# Altium PCB PCB1.PcbDoc
Units mil, origin at the board's own origin, x right, y up, seen from the top; angles counter-clockwise.
Board outline 1415.03 x 1550.03 mil, 2 copper layers (Top Layer, Bottom Layer); 27 components, 62 nets, 128 pads, 78 vias.
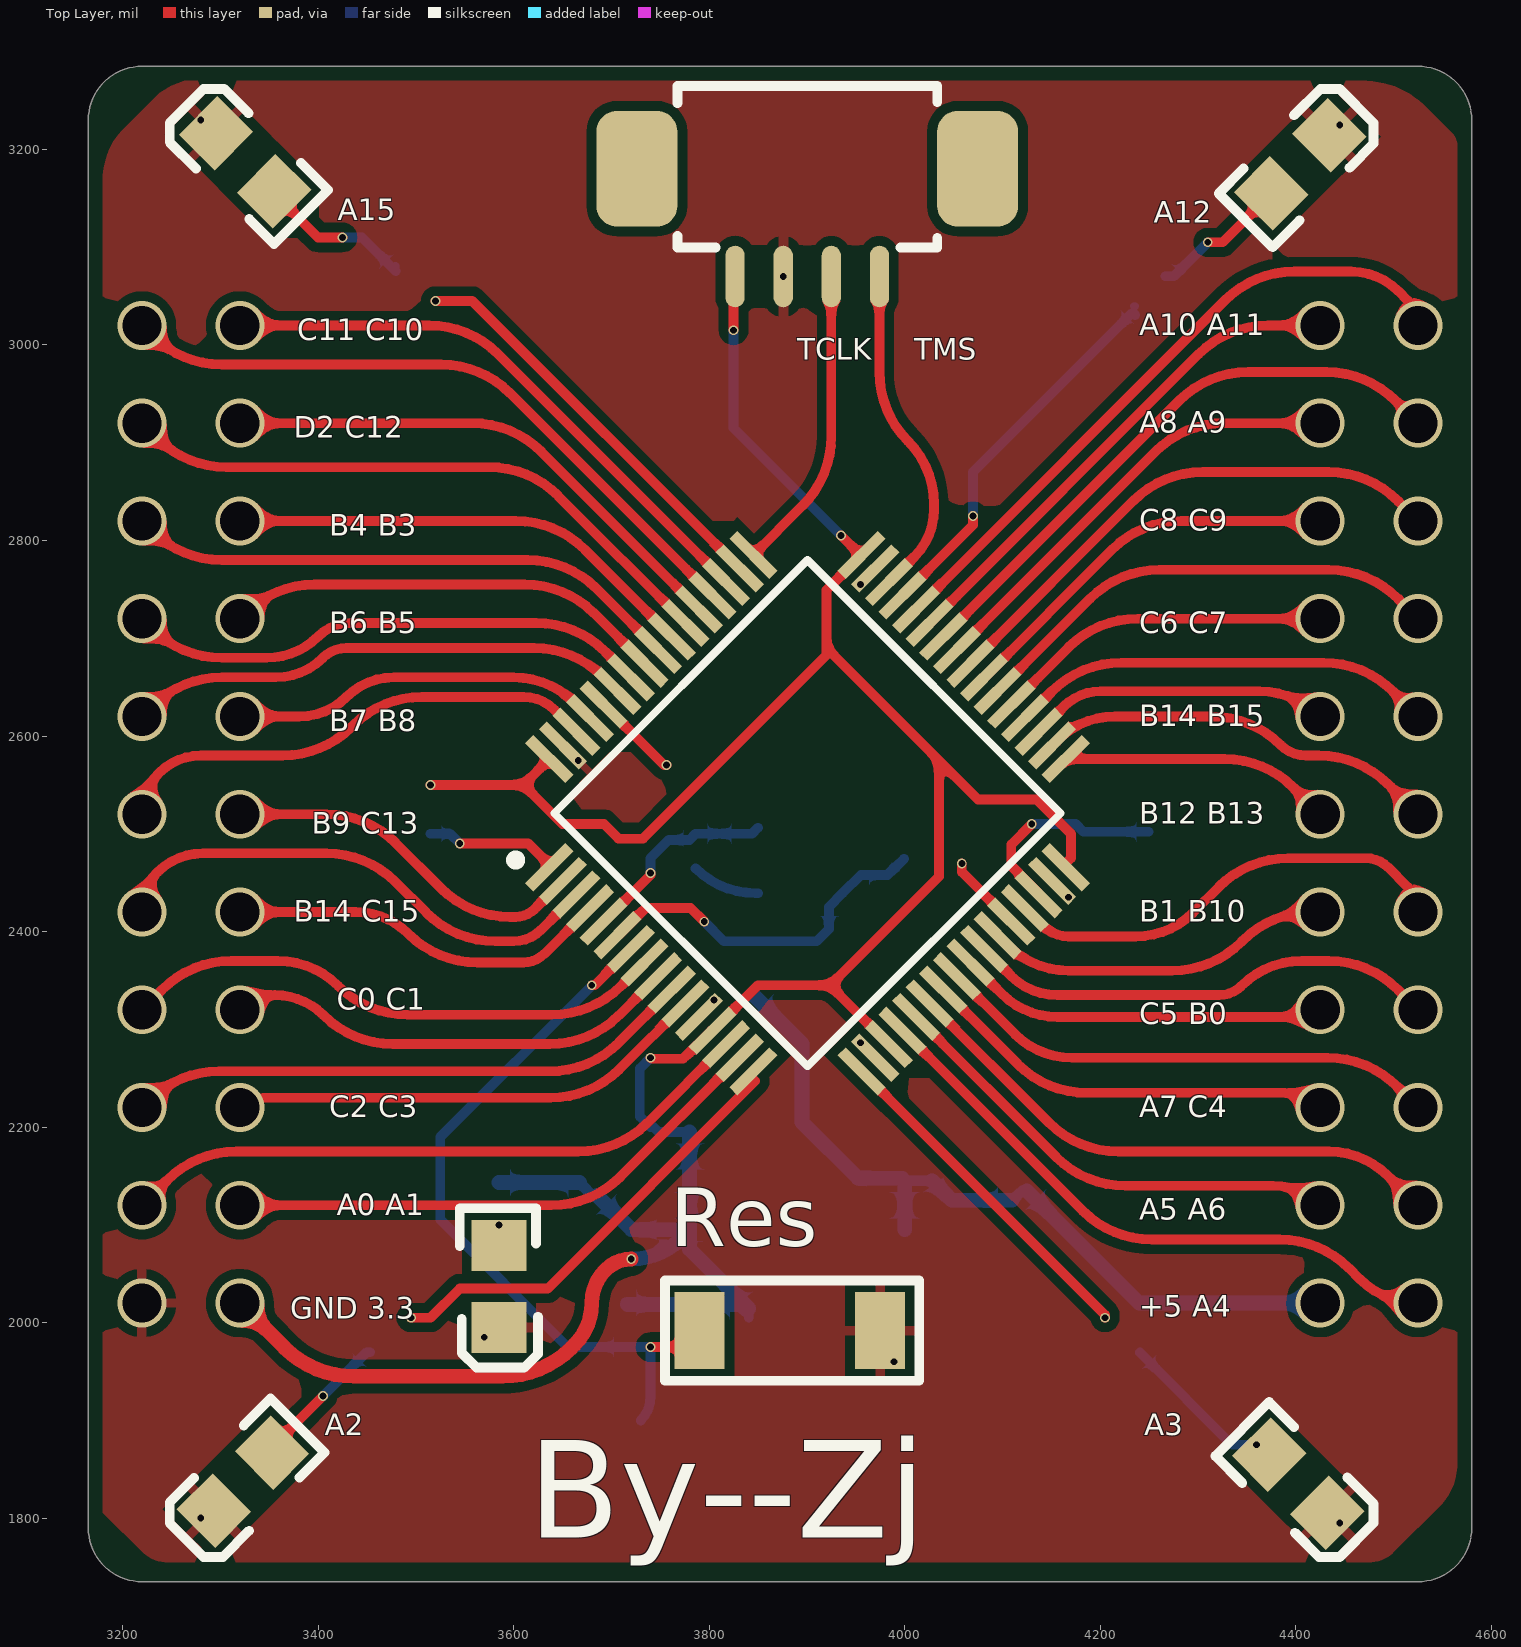
[diagram p0: Top Layer view]
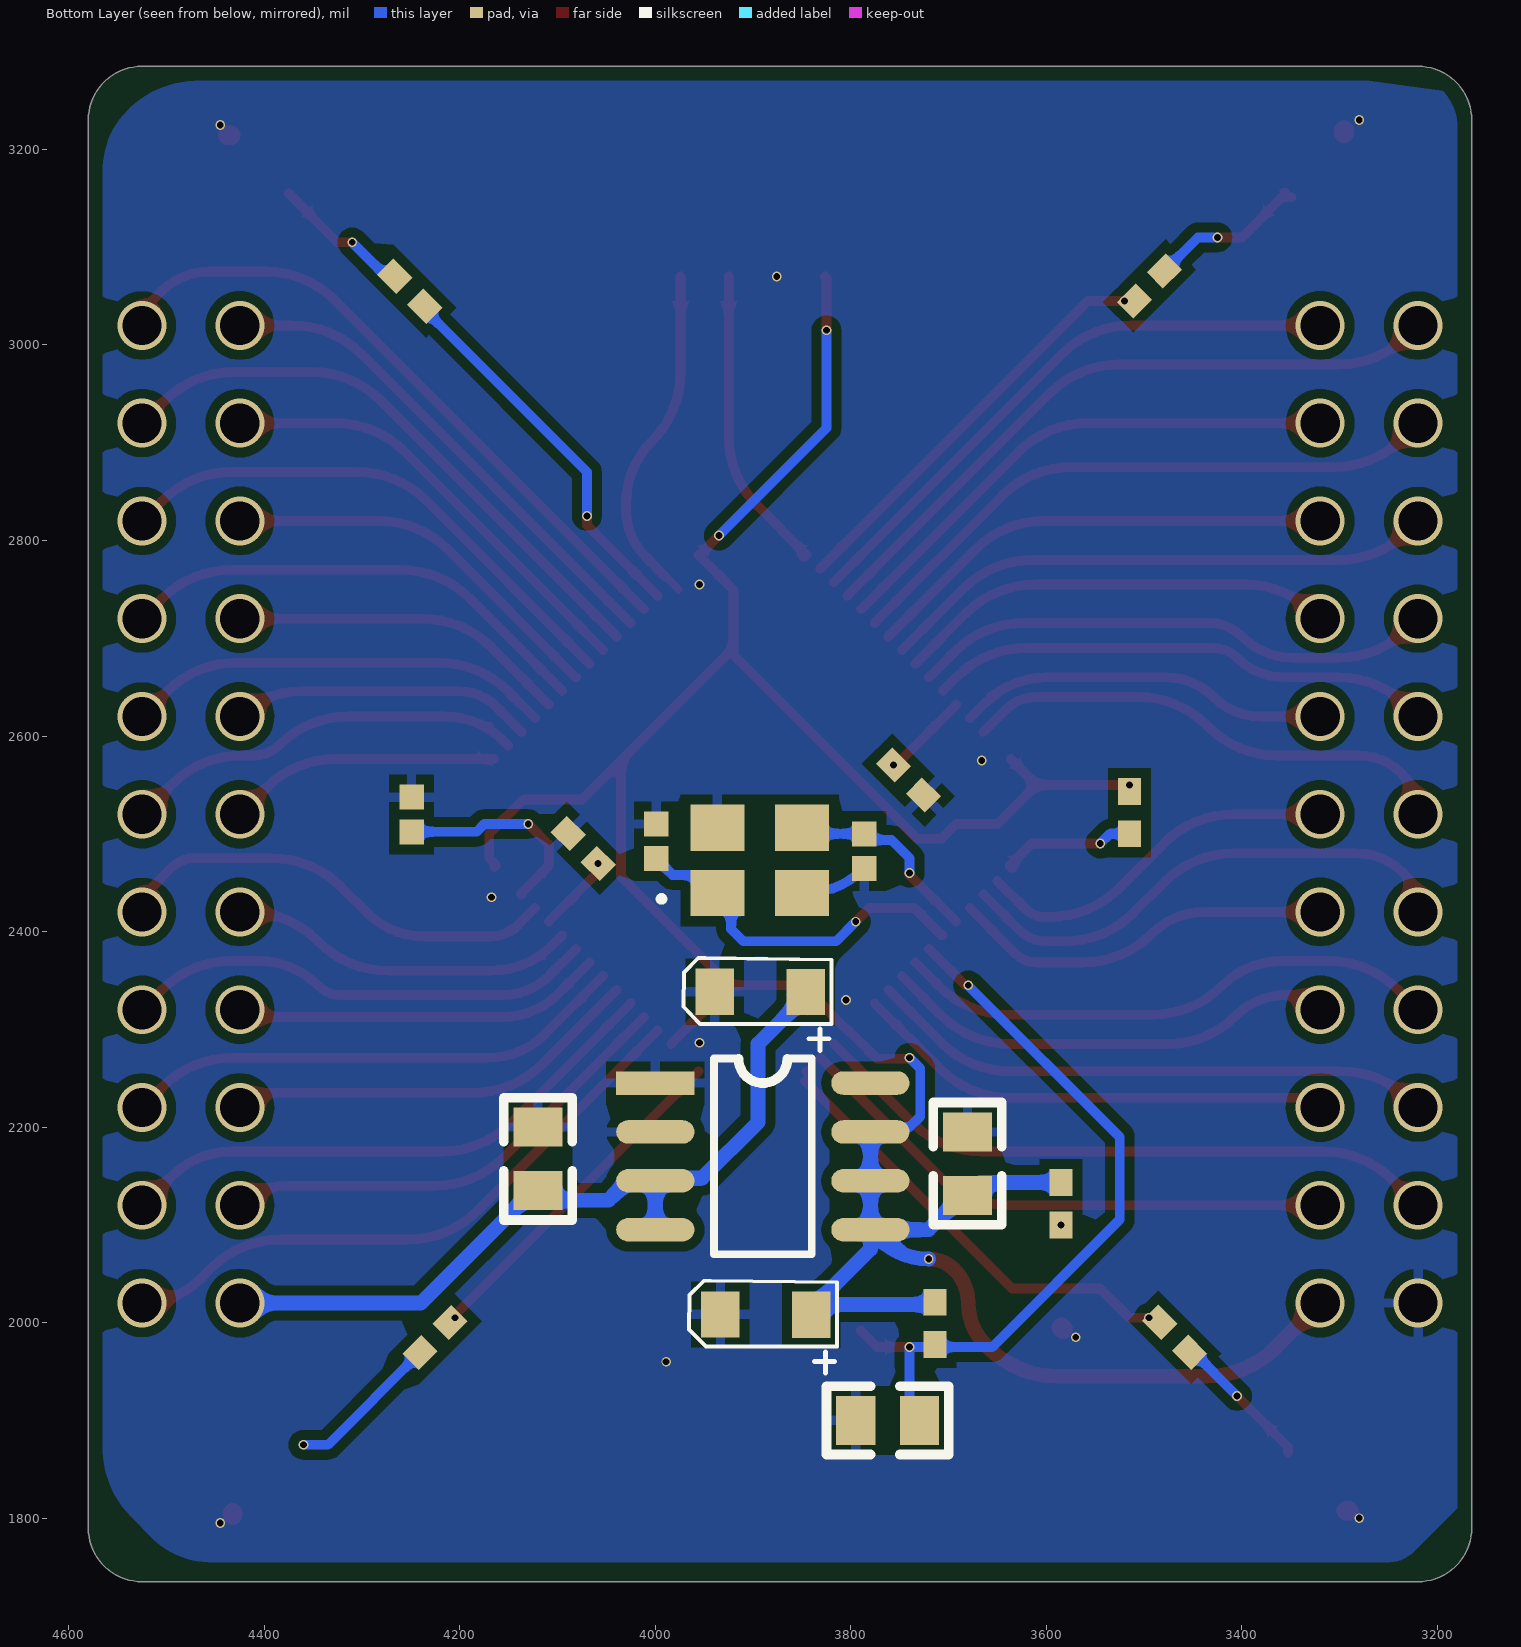
[diagram p1: Bottom Layer view, seen from below]
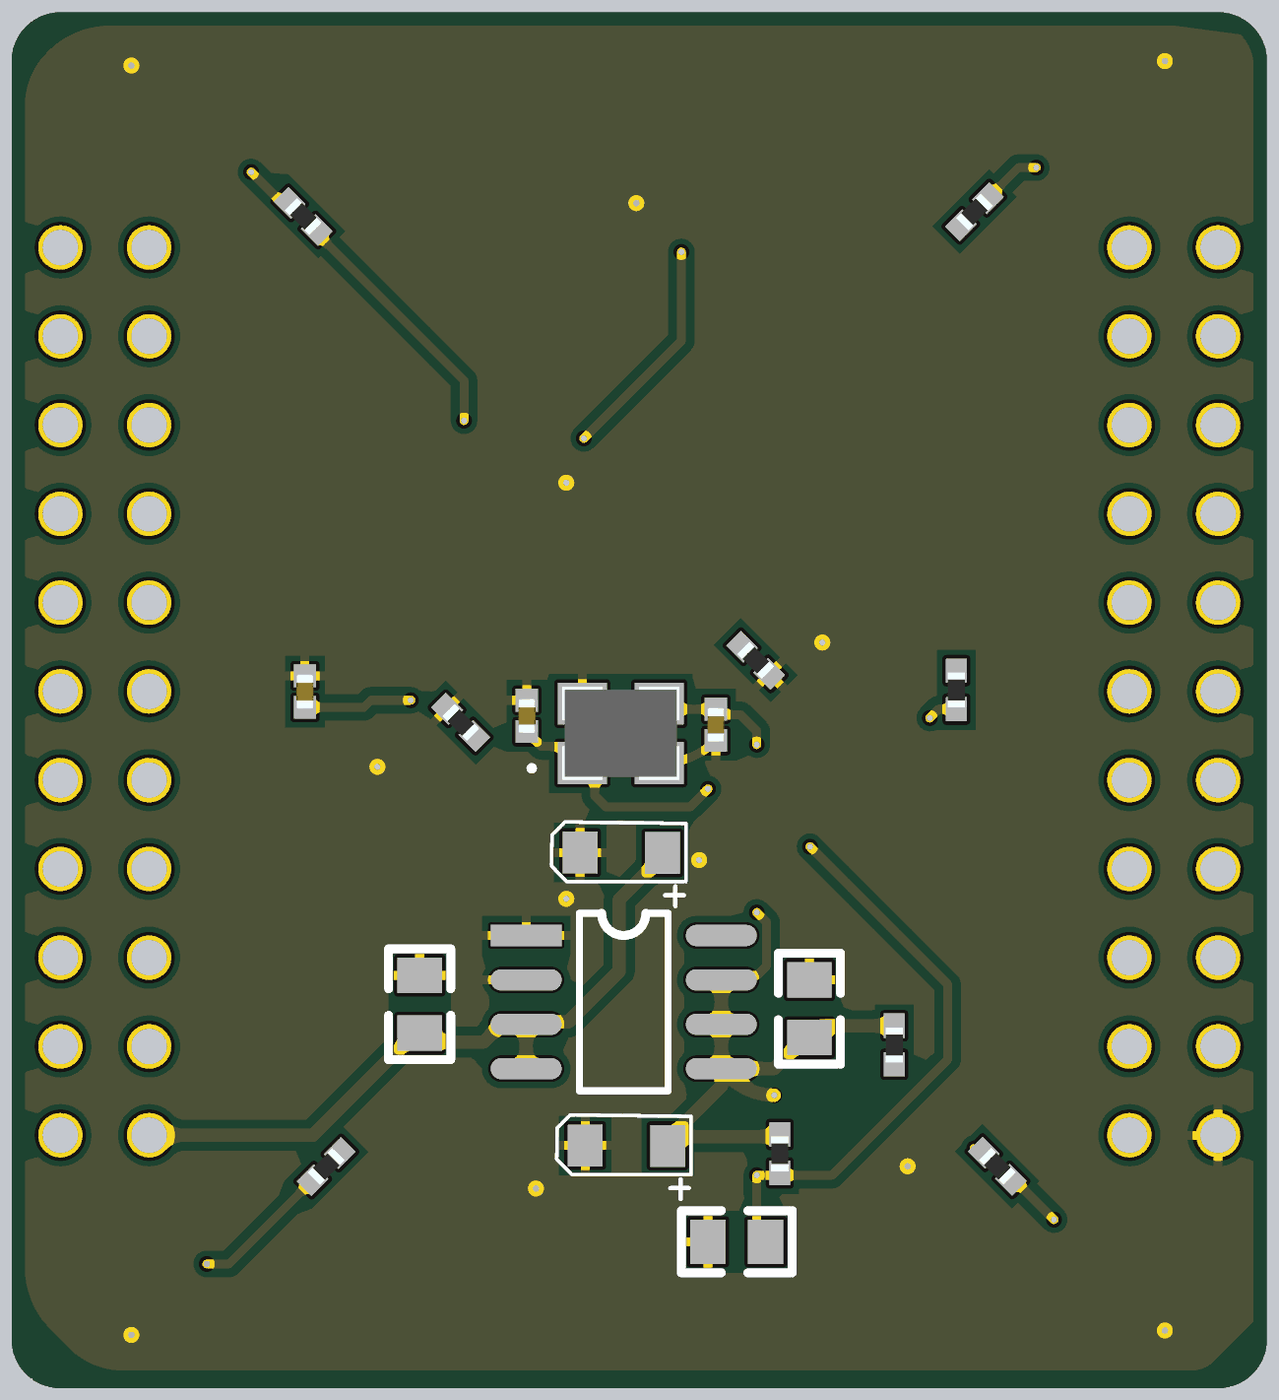
[diagram p2: 3D render of the assembled board from below, using the file's embedded part models]

## Layer stack, top to bottom
Top Solder: solder mask 0.4, Solder Resist, Dk 3.5
Top Layer: signal copper 1.4
Dielectric 1: dielectric 12.6, FR-4, Dk 4.8
Bottom Layer: signal copper 1.4
Bottom Solder: solder mask 0.4, Solder Resist, Dk 3.5

## Board outline
3164.99,1790 3164.99,3230 cw(c3220,3230) 3220,3285.01 4525,3285.01 cw(c4525,3230) 4580.01,3230 4580.01,1790 cw(c4525,1790) 4525,1734.98 3220,1734.98 cw(c3220,1790)

## Design rules (kind name [scope] priority, off if disabled: settings)
Clearance Clearance_1 [All] p1: gap=10 ignorepadtopadclearanceinfootprint=FALSE except(0: Arc-Hole Track-Hole SMDPad-Hole THPad-Hole Via-Hole Fill-Hole Poly-Hole Region-Hole Text-Hole)
PlaneConnect [All] p1: planeconnectstyle=Relief reliefexpansion=20 reliefentries=2 reliefconductorwidth=10 reliefairgap=10
PolygonConnect [All] p1: connectstyle=Relief reliefconductorwidth=10 reliefentries=4 polygonreliefangle="90 Angle" airgapwidth=10
RoutingVias [All] p1: holewidth=28 width=50 viastyle="Through Hole" minholewidth=28 minwidth=50 maxholewidth=28 maxwidth=50
SolderMaskExpansion [All] p1: expansion=4
UnRoutedNet [InNetClass('All Nets')] p1:
Width [All] p1: maxlimit=10 minlimit=8 preferedwidth=10
28 further rules are at their usual default settings.

## Components (designator, comment, footprint, x,y, rotation, side; value= is the part's Value field where it differs from the comment)
c1 "CAP _4.7UF" cap_0402 4250,2520 r270 bottom
C2 "CAP _20pf" cap_0402 3786.87,2482.56 r270 bottom
C3 "CAP _20pf" cap_0402 3998.54,2492.01 r90 bottom
c4 "C_104" RC0603 3680.68,2195 r270 bottom
c5 "C_104" RC0603 4120,2200 r270 bottom
c6 "钽电容10uf" "钽电容10uf 3216" 3884.21,2010 r0 bottom
c7 "钽电容10uf" "钽电容10uf 3216" 3890,2340 r0 bottom
c8 "C_104" RC0603 3795,1900 r180 bottom
j1 "晶振20M" 晶振20M 4032.36,2568.72 r180 bottom
k2 "下载口" 贴片4位接口 3705.71,3260.16 r0 top
l1 "LED" LED0805 4375,3155 r225 top
l2 "LED" LED0805 3355,3157.12 r315 top
l3 "LED" LED0805 3352.88,1867.12 r45 top
l4 "LED" LED0805 4372.88,1865 r135 top
l5 "LED" LED0805 3585,2079 r90 top
r1 "510R_0402" RC0402 4250,3055 r225 bottom
r2 "510R_0402" RC0402 3494.66,3059.11 r315 bottom
r3 "510R_0402" RC0402 3470,1985 r45 bottom
r4 "510R_0402" RC0402 4225.34,1985.89 r135 bottom
r5 "510R_0402" RC0402 3585.87,2122.48 r90 bottom
r6 "0R_0402" RC0402 3515.87,2522.48 r90 bottom
r7 "10K_0402" RC0402 3715,2000 r90 bottom
r8 "10K_0402" RC0402 3740,2555 r225 bottom
r9 "10K_0402" RC0402 4075,2485 r45 bottom
Res "按钮" SMT-KEY 3789.96,1991.81 r270 top (schematic designator k1)
s1 "STM32F412RET6_2" "stm32f412ret6 _2" 3367.25,1051.89 r45 top
t1 "tps7333" SOIC-8P 4000,2245 r270 bottom

## Footprints (in the part's own frame and the unit in brackets; to place one, negate y for a bottom-side part, rotate by r counter-clockwise, add the part's x,y. Pads: shape width x height; smd on the part's side, far side on the other; paste and mask are expansions set on the pad)
cap_0402 [mm]
  rect 0.65x0.64 smd: 1(-0.443,0.017) 2(0.457,0.017)
  body extent -0.49,-0.23 0.51,0.27, height 0.56
LED0805 [mil]
  rect 52x56 smd: 1(0,0) 2(-84,0)
  Top Layer lines w20: -84,0 -86,2
  silkscreen extent -125,-40 38,40
RC0402 [mm]
  rect 0.7x0.6 smd: 1(-0.571,-0.022) 2(0.529,-0.022)
  body extent -0.52,-0.27 0.48,0.23, height 0.35
RC0603 [mil]
  rect 40x50 smd: 1(0,0) 2(65,0)
  silkscreen extent -30,-35 95,35
SMT-KEY [mm]
  rect 2x1.3 smd paste+0 mask+0.2: 1(0,0) 2(0,4.7)
  silkscreen extent -1.3,-0.89 1.3,5.72
SOIC-8P [mil]
  rect 24x80 smd mask+3: 1(0,0)
  oval 24x80 smd mask+3: 2(50,0) 3(100,0) 4(150,0) 5(150,220) 6(100,220) 7(50,220) 8(0,220)
  silkscreen extent -25,60 175,160
"stm32f412ret6 _2" [mm]
  rect 1.475x0.3 smd: 1(30.23,20.559) 2(30.23,20.059) 3(30.23,19.559) 4(30.23,19.059) 5(30.23,18.559) 6(30.23,18.059) 7(30.23,17.559) 8(30.23,17.059) 9(30.23,16.559) 10(30.23,16.059) 11(30.23,15.559) 12(30.23,15.059) 13(30.23,14.559) 14(30.23,14.059) 15(30.23,13.559) 16(30.23,13.059) 33(41.706,13.059) 34(41.706,13.559) 35(41.706,14.059) 36(41.706,14.559) 37(41.706,15.059) 38(41.706,15.559) 39(41.706,16.059) 40(41.706,16.559) 41(41.706,17.059) 42(41.706,17.559) 43(41.706,18.059) 44(41.706,18.559) 45(41.706,19.059) 46(41.706,19.559) 47(41.706,20.059) 48(41.706,20.559)
  rect 0.3x1.475 smd: 17(32.218,11.071) 18(32.718,11.071) 19(33.218,11.071) 20(33.718,11.071) 21(34.218,11.071) 22(34.718,11.071) 23(35.218,11.071) 24(35.718,11.071) 25(36.218,11.071) 26(36.718,11.071) 27(37.218,11.071) 28(37.718,11.071) 29(38.218,11.071) 30(38.718,11.071) 31(39.218,11.071) 32(39.718,11.071) 49(39.718,22.547) 50(39.218,22.547) 51(38.718,22.547) 52(38.218,22.547) 53(37.718,22.547) 54(37.218,22.547) 55(36.718,22.547) 56(36.218,22.547) 57(35.718,22.547) 58(35.218,22.547) 59(34.718,22.547) 60(34.218,22.547) 61(33.718,22.547) 62(33.218,22.547) 63(32.718,22.547) 64(32.218,22.547)
  silkscreen extent 29.62,12.16 40.62,21.46, body extent 29.97,10.81 41.97,22.81, height 1.6
晶振20M [mm]
  rect 1.4x1.2 smd: 1(2.432,-3.288) 2(4.632,-3.288) 3(4.632,-1.588) 4(2.432,-1.588)
  silkscreen extent 0.93,-3.49 1.03,-3.39, body extent 1.85,-3.77 5.21,-1.11, height 1.1
贴片4位接口 [mm]
  oval 0.5x1.6 smd: 1(3.07,-4.83) 2(4.32,-4.83) 3(5.57,-4.83) 4(6.82,-4.83)
  rrect50% 2.1x3 smd: 5(0.52,-2.03) 6(9.37,-2.03)
  silkscreen extent 1.57,-4.08 8.32,0.12, body extent -0.13,-5.08 10.02,0.12, height 3.5
"钽电容10uf 3216" [mm]
  rect 1x1.2 smd: 1(-1.11,0.05) 2(1.25,0.04)
  silkscreen extent -1.78,-0.83 2.06,1.57

## Part data
c1: library part "CAP _20pf"
k2: library part 贴片4位

## Via types
v1: diameter 50, hole 40.16, Top Layer to Bottom Layer, 44 vias
v2: diameter 10, hole 7, Top Layer to Bottom Layer, 34 vias

## Nets (pads, with @x,y where several pads share a name; then routed paths per layer and width w, separated by ;. In a path a pad name is that pad's centre, name@x,y a point inside that pad or via, vN(x,y) a via of type N, cw(c..) or ccw(c..) an arc to the next point about the centre after c; other vN are vias at no path point)
3.3: c4.2 c6.1 k2.1 r5.2 r6.2 r7.2 s1.13 s1.19 s1.32 s1.48 s1.64 t1.5 t1.6 t1.7 | length 3188.7
  Top Layer w10: v2(3515,2550) 3610,2550 ; s1.64 3610,2550 ; 3659.29,1974.29 3662.32,1977.32 ; v2(3740,2270.92) 3740.92,2270 3773.47,2270 3802.24,2298.76 s1.13 3849.75,2345 3923.64,2345 ; v2(3825,3015) 3825,3068.43 k2.1 ; v2(3935,2805) 3954.73,2785.27 s1.48 3920,2749.31 3920,2690 ; s1.19 3923.64,2345 ; s1.32 4163.42,2467.13 4163.42,2468.42 4170,2475 4170,2500 4135,2535 4075,2535 4035,2575 ; 3610,2550 3650,2510 3692.36,2510 3707.36,2495 3732.24,2495 3920,2682.76 3920,2690 ; 3920,2690 4035,2575 ; 3923.64,2345 4035,2456.36 4035,2575
  Top Layer w15: v1(3320,2020) 3365.71,1974.29 ccw(c3436.42,2045) 3436.42,1945 3588.58,1945 ccw(c3588.58,2045) 3659.29,1974.29 ; 3662.32,1977.32 ccw(c3619.64,2020) 3680,2020 cw(c3728.28,2020) 3694.12,2054.12 cw(c3720.38,2027.86) v2(3720.38,2065)
  Bottom Layer w10: c4.2@3667.37,2143.31 c4.2 c4.2@3685.68,2130 ; r7.2 r7.2@3716.51,2018.45 ; v2(3740,2270.92) 3729.08,2260 3729.08,2210.92 3740,2200 3743.21,2200 3748.21,2195 t1.7 ; t1.5@3770.94,2085.94 t1.5 ; v2(3825,3015) 3825,2915 v2(3935,2805) ; c6.1@3830.09,2018.45 c6.1 ; c6.1@3840.51,2004.98 c6.1 ; c6.1@3840.51,2014.49 c6.1
  Bottom Layer w15: r5.2 c4.2@3667.37,2143.31 ; c4.2@3685.68,2130 3720.68,2095 t1.5 ; r7.2@3716.51,2018.45 c6.1@3830.09,2018.45 ; v2(3720.38,2065) ccw(c3720.38,2136.5) t1.5@3770.94,2085.94 ; t1.7 t1.6 t1.5 ; c6.1@3840.51,2014.49 3780,2075 t1.5
+5: c5.2 c7.1 t1.3 t1.4 | length 818.1
  Bottom Layer w10: c7.1@3846.3,2334.09 c7.1 ; t1.3@3997.32,2147.68 t1.3 t1.3@4028,2145 ; c5.2@4110,2125 c5.2 c5.2@4125,2135
  Bottom Layer w15: c7.1@3846.3,2334.09 3895,2285.39 3895,2205 3952.32,2147.68 t1.3@3997.32,2147.68 ; t1.4 t1.3 ; t1.3@4028,2145 4048,2125 c5.2@4110,2125 ; c5.2@4125,2135 4240,2020 v1(4425,2020)
BOOT0: r8.1 s1.60 | length 90
  Top Layer w10: s1.60 3754.04,2570.28 v2(3756.51,2570.28)
BOOT1: r9.1 s1.28 | length 80.6
  Top Layer w10: v2(4058.49,2469.72) 4058.49,2460.7 s1.28
GND: c1.1 C2.2 C3.2 c4.1 c5.1 c6.2 c7.2 c8.1 j1.2 j1.4 k2.2 l1.2 l2.2 l3.2 l4.2 l5.2 r8.2 r9.2 Res.2 s1.12 s1.18 s1.31 s1.47 s1.63 t1.1 t1.2 | length 70.6
  Bottom Layer w10: C2.2 ccw(c3847.26,2525.62) 3847.26,2439.28 j1.2
  other v1: 3220,2020
  other v2: 4445,1795 3280,1800 3988.94,1960 3570,1985 3954.73,2286.29 3805,2330 4167.63,2435 3666.17,2575 3954.73,2755 3875.79,3070 4445,3225 3280,3230
IN1: C2.1 j1.3 s1.5 | length 207.6
  Top Layer w10: s1.5 3740,2457.96 v2(3740,2460)
  Bottom Layer w10: v2(3740,2460) 3740,2475 3758.6,2493.6 3779.8,2493.6 C2.1 3843.79,2500 j1.3
IN2: C3.1 j1.1 s1.6 | length 367.2
  Top Layer w10: s1.6 3707.36,2396.2 3735.2,2424.04 3781.08,2424.04 v2(3795,2410.12)
  Bottom Layer w10: v2(3795,2410.12) 3815.12,2390 3910,2390 3922.5,2402.5 3922.5,2425.16 j1.1 3955.24,2457.9 3982.54,2457.9 3991.42,2466.77 3991.61,2466.77 3999.21,2474.37 C3.1
Netc1_2: c1.2 s1.30 | length 214.9
  Top Layer w10: v2(4130,2510) 4109.08,2489.08 4109.08,2467.08 4136.91,2439.24 s1.30
  Bottom Layer w10: v2(4130,2510) 4175,2510 4182.99,2502.01 c1.2
Netl1_1: l1.1 r1.1 | length 143.6
  Top Layer w10: v2(4310,3105) 4325,3105 l1.1
  Bottom Layer w10: r1.1 4275.28,3070.28 v2(4310,3105)
Netl2_1: l2.1 r2.1 | length 161.7
  Top Layer w10: l2.1@3348.99,3151.11 3358.89,3151.11 3400,3110 v2(3425,3110)
  Bottom Layer w10: v2(3425,3110) 3445,3110 r2.1
Netl3_1: l3.1 r3.1 | length 146.5
  Top Layer w10: l3.1 3352.88,1872.88 v2(3405,1925)
  Bottom Layer w10: v2(3405,1925) 3449.72,1969.72 r3.1
Netl4_1: l4.1 r4.1 | length 158.5
  Bottom Layer w10: r4.1 4335,1875 v2(4360,1875)
Netl5_1: l5.1 r5.1
  other v2: 3585,2100
Netr6_1: r6.1 s1.1 | length 139.8
  Top Layer w10: v2(3545,2490) 3615,2490 3637.2,2467.8 3637.2,2466.52 s1.1 3635.98,2465.3 s1.1@3634.7,2465.3
  Bottom Layer w10: r6.1 3535,2500 v2(3545,2490)
NRST: c8.2 r7.1 Res.1 s1.7 | length 762.9
  Top Layer w10: v2(3680,2345) 3682.72,2345 s1.7 ; v2(3740,1975) 3773.15,1975 Res.1
  Bottom Layer w10: v2(3680,2345) 3525,2190 3525,2105.34 3655.34,1975 v2(3740,1975) 3740,1924.14 cw(c3705.86,1924.14) c8.2
PA0: s1.14 | length 657.1
  Top Layer w10: v1(3220,2120) 3245.71,2145.71 cw(c3316.42,2075) 3316.42,2175 3666.17,2175 ccw(c3666.17,2275) 3736.88,2204.29 s1.14
PA1: s1.15 | length 569.6
  Top Layer w10: v1(3320,2120) 3638.58,2120 ccw(c3638.58,2220) 3709.29,2149.29 3830.92,2270.92 s1.15
PA2: r3.2 s1.16 | length 465.9
  Top Layer w10: v2(3495,2005) 3515,2005 3545,2035 3635,2035 3847,2247 3841.77,2252.22 3841.77,2253.5 s1.16
PA3: r4.2 s1.17 | length 355.2
  Top Layer w10: s1.17 4205,2007.97 v2(4205,2005)
PA4: s1.20 | length 630.5
  Top Layer w10: s1.20 4182.19,2114.29 ccw(c4252.9,2185) 4252.9,2085 4383.58,2085 cw(c4383.58,1985) 4454.29,2055.71 4465.25,2044.75 ccw(c4525,2104.5) v1(4525,2020)
PA5: s1.21 | length 485.9
  Top Layer w10: s1.21 4155.03,2169.29 ccw(c4225.74,2240) 4225.74,2140 4376.72,2140 cw(c4376.72,2071.72) v1(4425,2120)
PA6: s1.22 | length 577
  Top Layer w10: s1.22 4147.87,2204.29 ccw(c4218.58,2275) 4218.58,2175 4433.93,2175 cw(c4433.93,2089.64) 4494.29,2150 4523.79,2120.5 ccw(c4525,2121.72) v1(4525,2120)
PA7: s1.23 | length 428.9
  Top Layer w10: s1.23 4115.71,2264.29 ccw(c4186.42,2335) 4186.42,2235 4388.79,2235 cw(c4388.79,2183.79) v1(4425,2220)
PA8: s1.41 | length 463.5
  Top Layer w10: s1.41 4256.27,2890.71 cw(c4326.98,2820) 4326.98,2920 v1(4425,2920)
PA9: s1.42 | length 610.6
  Top Layer w10: s1.42 4280.64,2942.92 cw(c4351.35,2872.21) 4351.35,2972.21 4431.37,2972.21 cw(c4431.37,2872.21) 4502.08,2942.92 v1(4525,2920)
PA10: s1.43 | length 521.2
  Top Layer w10: s1.43 4025.68,2715.68 4300.71,2990.71 cw(c4371.42,2920) 4371.42,3020 v1(4425,3020)
PA11: s1.44 | length 679.2
  Top Layer w10: s1.44 4327.75,3045.71 cw(c4398.46,2975) 4398.46,3075 4456.72,3075 cw(c4456.72,3006.72) 4505,3055 4514.39,3045.61 cw(c4488.79,3020) v1(4525,3020)
PA12: r1.2 s1.45 | length 389.6
  Top Layer w10: s1.45 4070,2815.8 v2(4070,2825)
  Bottom Layer w10: v2(4070,2825) 4070,2870 4231.57,3031.57 4234.98,3031.57 r1.2@4235.89,3030.66
PA15: r2.2 s1.50 | length 424.7
  Top Layer w10: v2(3520,3045) 3557.71,3045 s1.50
PB0: s1.26 | length 486.3
  Top Layer w10: s1.26 4109.09,2354.42 ccw(c4155.99,2401.32) 4155.99,2335 4321.86,2335 ccw(c4321.86,2366.72) 4344.29,2344.29 cw(c4406.36,2282.22) 4406.36,2370 4433.58,2370 cw(c4433.58,2270) 4504.29,2340.71 v1(4525,2320)
PB1: s1.27 | length 357.3
  Top Layer w10: s1.27 4105.71,2385.65 ccw(c4167.63,2447.56) 4167.63,2360 4273.58,2360 ccw(c4273.58,2460) 4344.29,2389.29 4345.71,2390.71 cw(c4416.42,2320) 4416.42,2420 v1(4425,2420)
PB3: s1.55 | length 486.4
  Top Layer w10: v1(3320,2820) 3602.1,2820 cw(c3602.1,2720) 3672.81,2790.71 s1.55
PB4: s1.56 | length 574
  Top Layer w10: v1(3220,2820) 3230.71,2809.29 ccw(c3301.42,2880) 3301.42,2780 3614.26,2780 cw(c3614.26,2680) 3684.97,2750.71 s1.56
PB5: s1.57 | length 453.4
  Top Layer w10: v1(3320,2720) 3325.71,2725.71 cw(c3396.42,2655) 3396.42,2755 3611.42,2755 cw(c3611.42,2655) 3682.13,2725.71 s1.57
PB6: s1.58 | length 540.6
  Top Layer w10: v1(3220,2720) 3230.71,2709.29 ccw(c3301.42,2780) 3301.42,2680 3347.47,2680 ccw(c3347.47,2754.29) 3400,2701.76 cw(c3433.6,2668.15) 3433.6,2715.68 3622.9,2715.68 cw(c3622.9,2615.68) 3693.61,2686.39 s1.58
PB7: s1.59 | length 520.3
  Top Layer w10: v1(3220,2620) 3230.71,2630.71 cw(c3301.42,2560) 3301.42,2660 3356.72,2660 ccw(c3356.72,2728.28) 3405,2680 cw(c3429.14,2655.86) 3429.14,2690 3620.74,2690 cw(c3620.74,2590) 3691.45,2660.71 s1.59
PB8: s1.61 | length 382.4
  Top Layer w10: v1(3320,2620) 3380.86,2620 ccw(c3380.86,2688.28) 3429.14,2640 cw(c3477.43,2591.72) 3477.43,2660 3600,2660 cw(c3600,2571.92) 3662.28,2634.2 s1.61
PB9: s1.62 | length 507.7
  Top Layer w10: v1(3220,2520) cw(c3280,2520) 3280,2580 3363.58,2580 ccw(c3363.58,2680) 3434.29,2609.29 3435.71,2610.71 cw(c3506.42,2540) 3506.42,2640 3610,2640 cw(c3610,2594.99) 3641.83,2626.82 s1.62
PB10: s1.29 | length 466.4
  Top Layer w10: s1.29 4141.01,2406.03 ccw(c4167.63,2432.64) 4167.63,2395 4236.36,2395 ccw(c4236.36,2477.93) 4295,2419.29 4321.42,2445.71 cw(c4392.13,2375) 4392.13,2475 4472.07,2475 cw(c4472.07,2443.58) 4494.29,2465.8 4514.33,2445.75 cw(c4488.58,2420) v1(4525,2420)
PB12: s1.33 | length 279.3
  Top Layer w10: s1.33 4327.1,2576.48 cw(c4327.1,2476.48) 4397.81,2547.19 v1(4425,2520)
PB13: s1.34 | length 414.1
  Top Layer w10: s1.34 4155.99,2595.56 cw(c4215,2536.54) 4215,2620 4313.98,2620 cw(c4313.98,2520) 4384.69,2590.71 ccw(c4410.55,2616.57) 4410.55,2580 4423.58,2580 cw(c4423.58,2480) 4494.29,2550.71 v1(4525,2520)
PB14: s1.35 | length 309.8
  Top Layer w10: s1.35 4162.96,2630.37 cw(c4200,2593.33) 4200,2645.71 4362.93,2645.71 cw(c4362.93,2557.93) v1(4425,2620)
PB15: s1.36 | length 439.7
  Top Layer w10: s1.36 4123.24,2618.24 4150.71,2645.71 cw(c4221.42,2575) 4221.42,2675 4428.58,2675 cw(c4428.58,2575) 4499.29,2645.71 v1(4525,2620)
PC0: s1.8 | length 562.8
  Top Layer w10: v1(3220,2320) 3240.71,2340.71 cw(c3311.42,2270) 3311.42,2370 3358.64,2370 cw(c3358.64,2282.22) 3420.71,2344.29 ccw(c3491.42,2415) 3491.42,2315 3639.14,2315 ccw(c3639.14,2415) 3709.85,2344.29 s1.8
PC1: s1.9 | length 469.7
  Top Layer w10: v1(3320,2320) 3320.36,2320.36 cw(c3355.71,2285) 3355.71,2335 cw(c3355.71,2264.29) 3405.71,2314.29 ccw(c3476.42,2385) 3476.42,2285 3636.98,2285 ccw(c3636.98,2385) 3707.69,2314.29 s1.9
PC2: s1.10 | length 583.1
  Top Layer w10: v1(3220,2220) 3227.72,2227.72 cw(c3298.43,2157) 3298.43,2257 3636.82,2257 ccw(c3636.82,2357) 3707.53,2286.29 s1.10
PC3: s1.11 | length 494.1
  Top Layer w10: v1(3320,2220) cw(c3344.14,2195.86) 3344.14,2230 3637.65,2230 ccw(c3637.65,2330) 3708.37,2259.29 s1.11
PC4: s1.24 | length 519.4
  Top Layer w10: s1.24 4112.78,2295.06 ccw(c4171.05,2353.34) 4171.05,2270.92 4432.65,2270.92 cw(c4432.65,2170.92) 4503.37,2241.63 v1(4525,2220)
PC5: s1.25 | length 379.3
  Top Layer w10: s1.25 4099.67,2336.01 ccw(c4155.99,2392.33) 4155.99,2312.68 4407.33,2312.68 ccw(c4407.33,2337.67) v1(4425,2320)
PC6: s1.37 | length 348
  Top Layer w10: s1.37 4167.63,2690.71 cw(c4238.34,2620) 4238.34,2720 v1(4425,2720)
PC7: s1.38 | length 493.3
  Top Layer w10: s1.38 4189.79,2740.71 cw(c4260.5,2670) 4260.5,2770 4433.58,2770 cw(c4433.58,2670) 4504.29,2740.71 v1(4525,2720)
PC8: s1.39 | length 405.7
  Top Layer w10: s1.39 4081.48,2660 4212.19,2790.71 cw(c4282.9,2720) 4282.9,2820 v1(4425,2820)
PC9: s1.40 | length 551
  Top Layer w10: s1.40 4234.11,2840.71 cw(c4304.82,2770) 4304.82,2870 4433.58,2870 cw(c4433.58,2770) 4504.29,2840.71 v1(4525,2820)
PC10: s1.51 | length 601.9
  Top Layer w10: v1(3320,3020) 3513.45,3020 cw(c3513.45,2920) 3584.16,2990.71 s1.51
PC11: s1.52 | length 689.4
  Top Layer w10: v1(3220,3020) 3230.71,3009.29 ccw(c3301.42,3080) 3301.42,2980 3525.61,2980 cw(c3525.61,2880) 3596.32,2950.71 s1.52
PC12: s1.53 | length 544.2
  Top Layer w10: v1(3320,2920) 3557.77,2920 cw(c3557.77,2820) 3628.48,2890.71 s1.53
PC13: s1.2 | length 379.4
  Top Layer w10: v1(3320,2520) 3408.58,2520 cw(c3408.58,2420) 3479.29,2490.71 3525.71,2444.29 ccw(c3596.42,2515) 3596.42,2415 3602.1,2415 ccw(c3602.1,2442.6) 3621.61,2423.08 s1.2
PC14: s1.3 | length 525.5
  Top Layer w10: v1(3220,2420) 3220,2422.77 cw(c3273.64,2422.77) 3235.71,2460.7 cw(c3282.3,2414.11) 3282.3,2480 3408.58,2480 cw(c3408.58,2380) 3479.29,2450.71 3510.71,2419.29 ccw(c3581.42,2490) 3581.42,2390 3600,2390 ccw(c3600,2429.51) 3627.94,2401.57 s1.3
PC15: s1.4 | length 393.8
  Top Layer w10: v1(3320,2420) 3438.39,2420 cw(c3438.39,2343.69) 3492.35,2397.65 ccw(c3563.06,2468.36) 3563.06,2368.36 3610,2368.36 ccw(c3610,2398.69) 3631.45,2377.24 s1.4
PD2: s1.54 | length 631.7
  Top Layer w10: v1(3220,2920) 3235.71,2904.29 ccw(c3306.42,2975) 3306.42,2875 3574.93,2875 cw(c3574.93,2775) 3645.64,2845.71 s1.54
TCLK: k2.3 s1.49 | length 317.4
  Top Layer w10: s1.49@3848.42,2783.42 3847.13,2783.42 s1.49 3895.71,2835.71 ccw(c3825,2906.42) 3925,2906.42 k2.3
TMS: k2.4 s1.46 | length 336.6
  Top Layer w10: k2.4 3974.21,2972.21 ccw(c4074.21,2972.21) 4003.5,2901.5 cw(c3939.53,2837.53) 4030,2837.53 4030,2831.7 cw(c3961.72,2831.7) 4010,2783.42 s1.46@3988.94,2762.35
pads on no net: k2.5 k2.6 t1.8
copper on no net: | length 31.1
  Top Layer w7: 3355,3157.12 3357.88,3157.12
  Top Layer w8: 3976.37,2750 3983.8,2757.44 3991.37,2765 ; 3997.72,2743.52 3998.52,2743.52
  Bottom Layer w8: 3479.38,3075.62 3479.38,3080.62 ; 4234.66,3039.66 4235.89,3039.66

## Polygon pours and split planes (outlines as drawn)
GND on Bottom Layer "GND_L02_P-001" (solid, remove dead copper, pour order 52): 3270,3270 4468.58,3270 cw(c4468.58,3170) 4539.29,3240.71 4540,3240 cw(c4479.64,3179.64) 4565,3179.64 4565,1871.42 cw(c4465,1871.42) 4535.71,1800.71 4515,1780 cw(c4454.64,1840.36) 4454.64,1755 3250,1755 cw(c3250,1791.21) 3224.39,1765.61 3180,1810 3180,3223.79 cw(c3231.21,3223.79) 3195,3260
GND on Bottom Layer "GND_L02_P-001" (solid, remove dead copper, pour order 54): 3670,1450
GND on Top Layer "GND_L02_P-001" (solid, remove dead copper, pour order 60): 3250,3265 cw(c3262.07,3252.93) 3262.07,3270 4470,3270 cw(c4470,3181.84) 4532.34,3244.18 4560,3216.52 cw(c4547.93,3204.45) 4565,3204.45 4565,1855 cw(c4504.64,1855) 4547.32,1812.32 4500,1765 cw(c4475.86,1789.14) 4475.86,1755 3245,1755 cw(c3245,1789.76) 3220.42,1765.18 3180,1805.6 3180,3170 cw(c3252.43,3170) 3201.21,3221.21 3250,3270

## Silkscreen, mask and mechanical layers (free items; w line width, h text height)
Top Overlay:
  text "A15" at 3420,3127.42 h22
  text "A12" at 4255,3125 h22
  text "A10 A11" at 4240,3010 h22
  text "C11 C10" at 3378.67,3005 h22
  text "TCLK" at 3890,2985 h22
  text "TMS" at 4010,2985 h22
  text "A8 A9" at 4240,2910 h22
  text "D2 C12" at 3375,2905 h22
  text "C8 C9" at 4240,2810 h22
  text "B4 B3" at 3411.65,2805 h22
  text "B6 B5" at 3411.65,2705 h22
  text "C6 C7" at 4240,2705 h22
  text "B14 B15" at 4240,2610 h22
  text "B7 B8" at 3411.65,2605 h22
  text "B12 B13" at 4240,2510 h22
  text "B9 C13" at 3393.33,2500 h22
  text "B14 C15" at 3375,2410.12 h22
  text "B1 B10" at 4240,2410 h22
  text "C0 C1" at 3418.99,2320 h22
  text "C5 B0" at 4240,2305 h22
  text "C2 C3" at 3411.65,2210 h22
  text "A7 C4" at 4240,2210 h22
  text "A0 A1" at 3418.99,2110 h22
  text "A5 A6" at 4240,2105 h22
  text "+5 A4" at 4240,2006 h22
  text "GND 3.3" at 3371.33,2004 h22
  text "A2" at 3406.62,1885 h22
  text "A3" at 4245,1885 h22
  text "By--Zj" at 3615,1780 h100
Mechanical 1:
  lines w8: 3170,3025 3170,3935 ; 4225,1740 5415,1740 ; 4360,3280 5370,3280 ; 4575,3030 4575,3925
  lines w10: 3255,3280 4445,3280 ; 3265,3280 3220,3280 ccw(c3220,3230) 3170,3230 3170,3195 3170,1830 3170,1790 ccw(c3220,1790) 3220,1740 3260,1740 4475,1740 4525,1740 ccw(c4525,1790) 4575,1790 4575,1840 4575,3165 4575,3173.79 4575,3230 ccw(c4525,3230) 4525,3280 4470,3280 4445,3280 ; 4430,3280 4445,3280

## Dimensions
5415,1740 to 5370,3280 on Mechanical 1
3175,3715 to 4575,3925 on Mechanical 1